# Altium PCB PCB1.PcbDoc
Units mm, origin at the board's own origin, x right, y up, seen from the top; angles counter-clockwise.
Board outline 50 x 50 mm, 2 copper layers (Top Layer, Bottom Layer), stack 1.57 mm thick; 8 components, 5 nets, 25 pads, 0 vias.
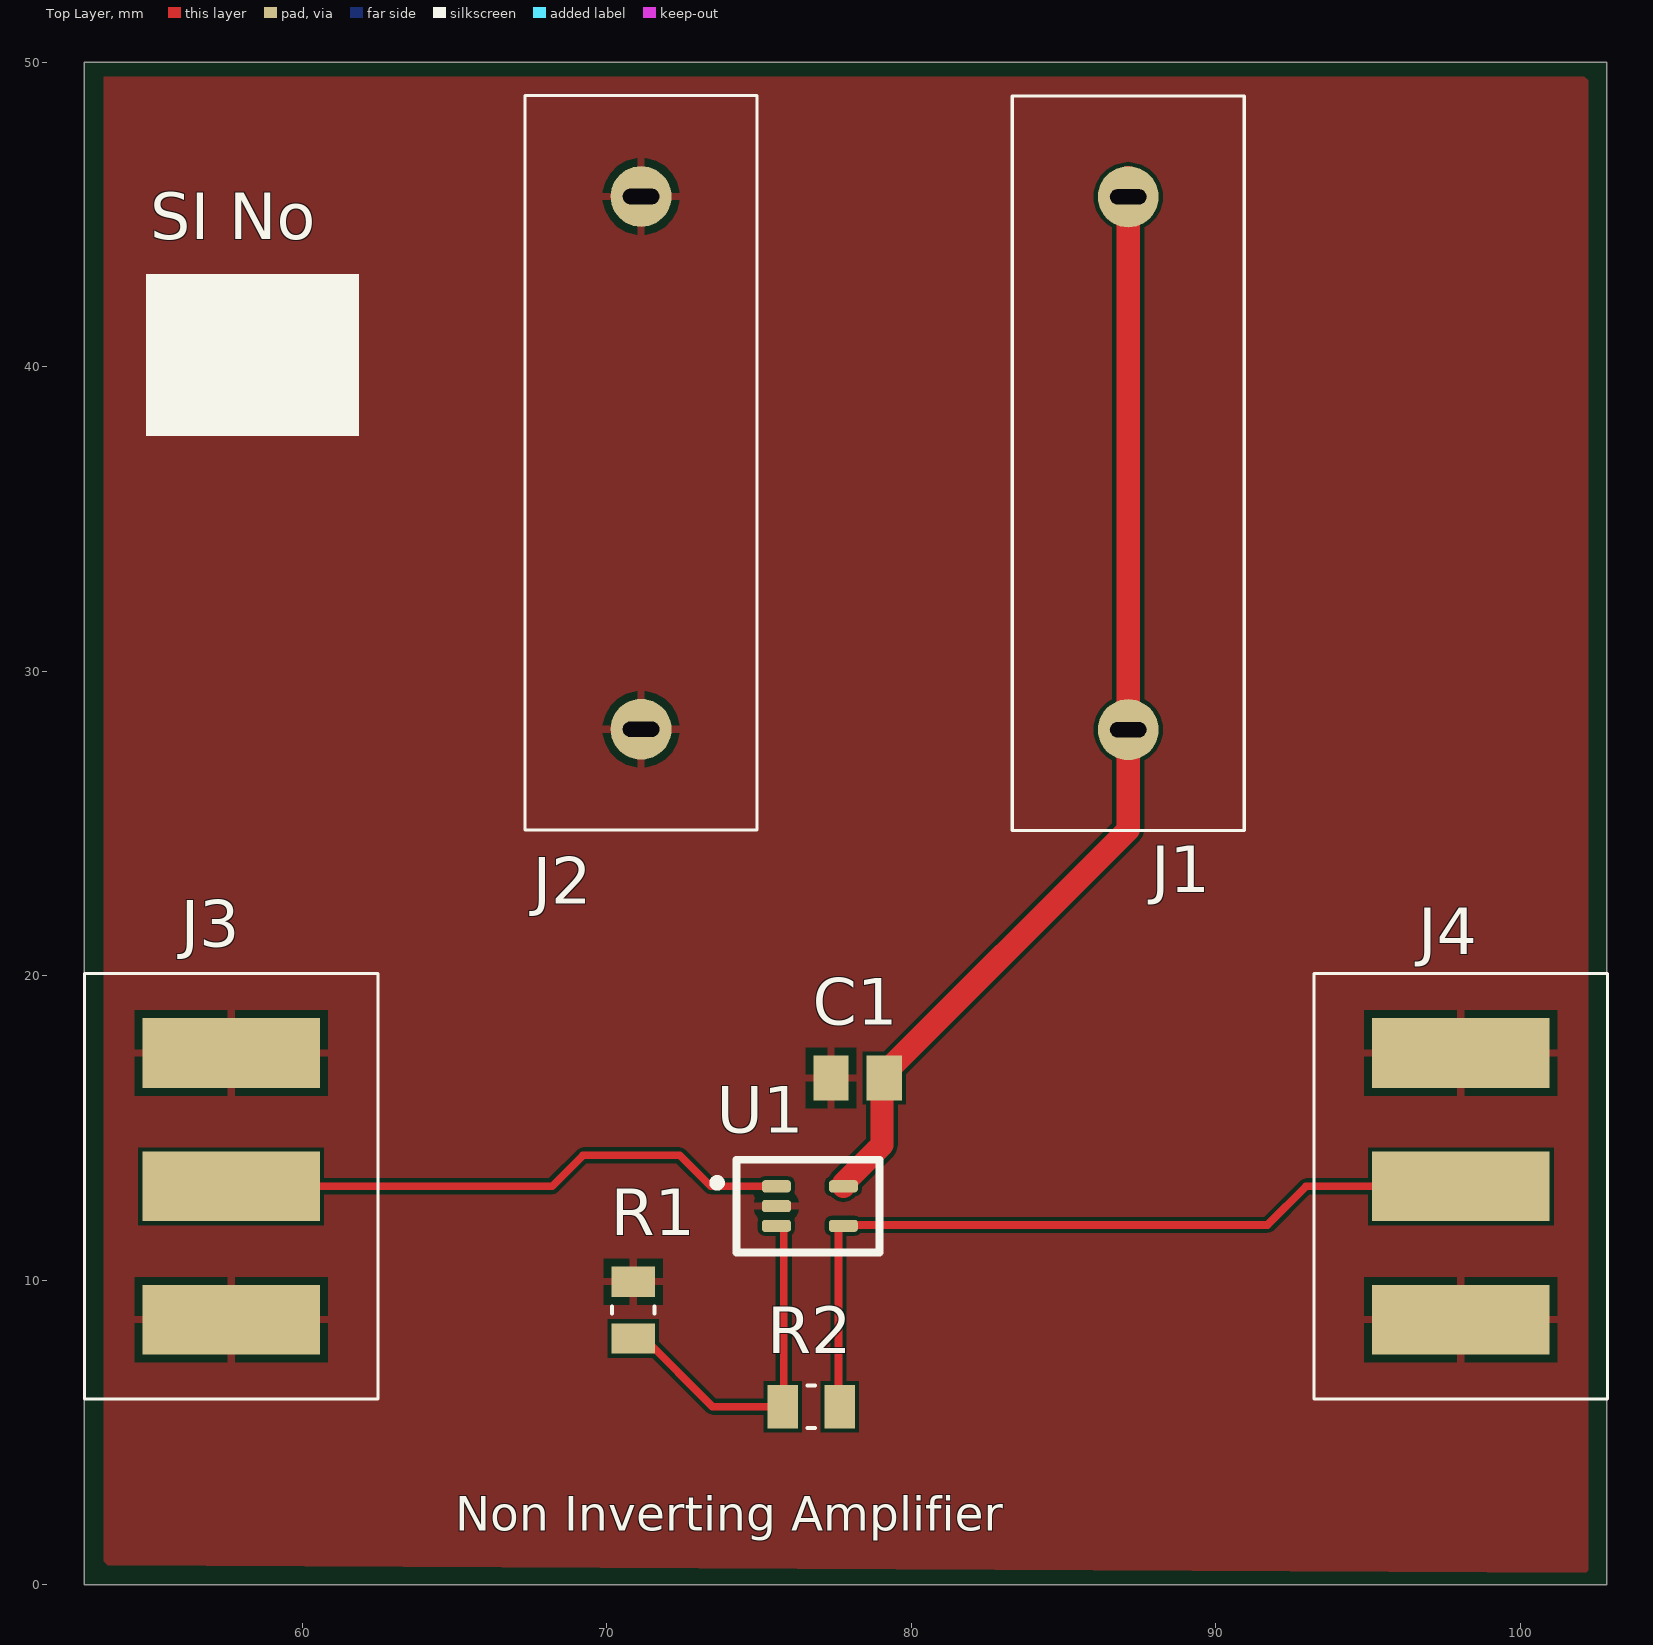
[diagram p0: Top Layer view]
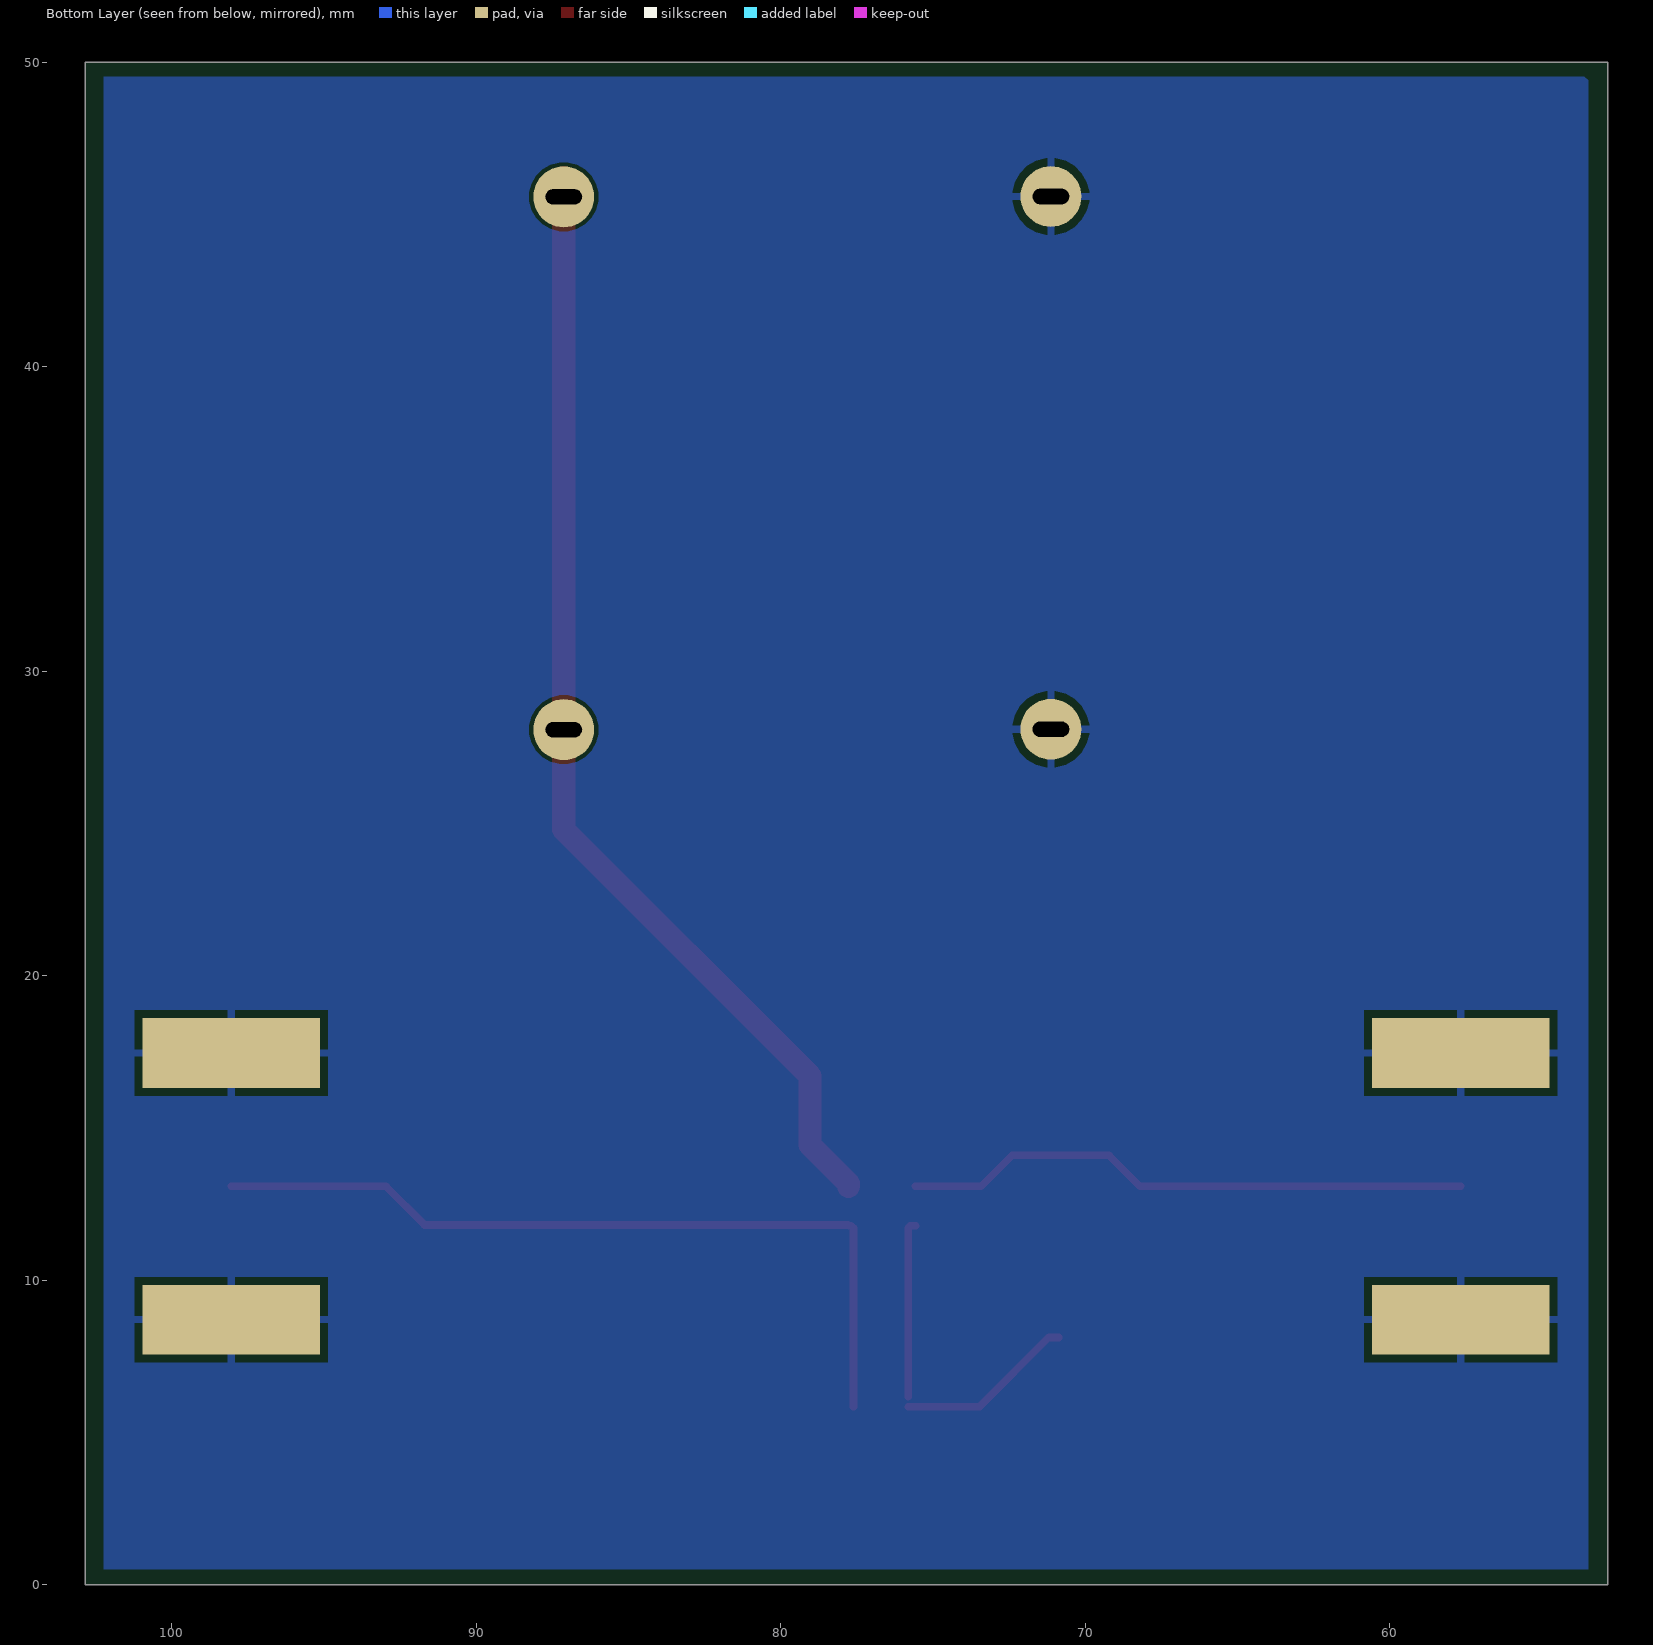
[diagram p1: Bottom Layer view, seen from below]
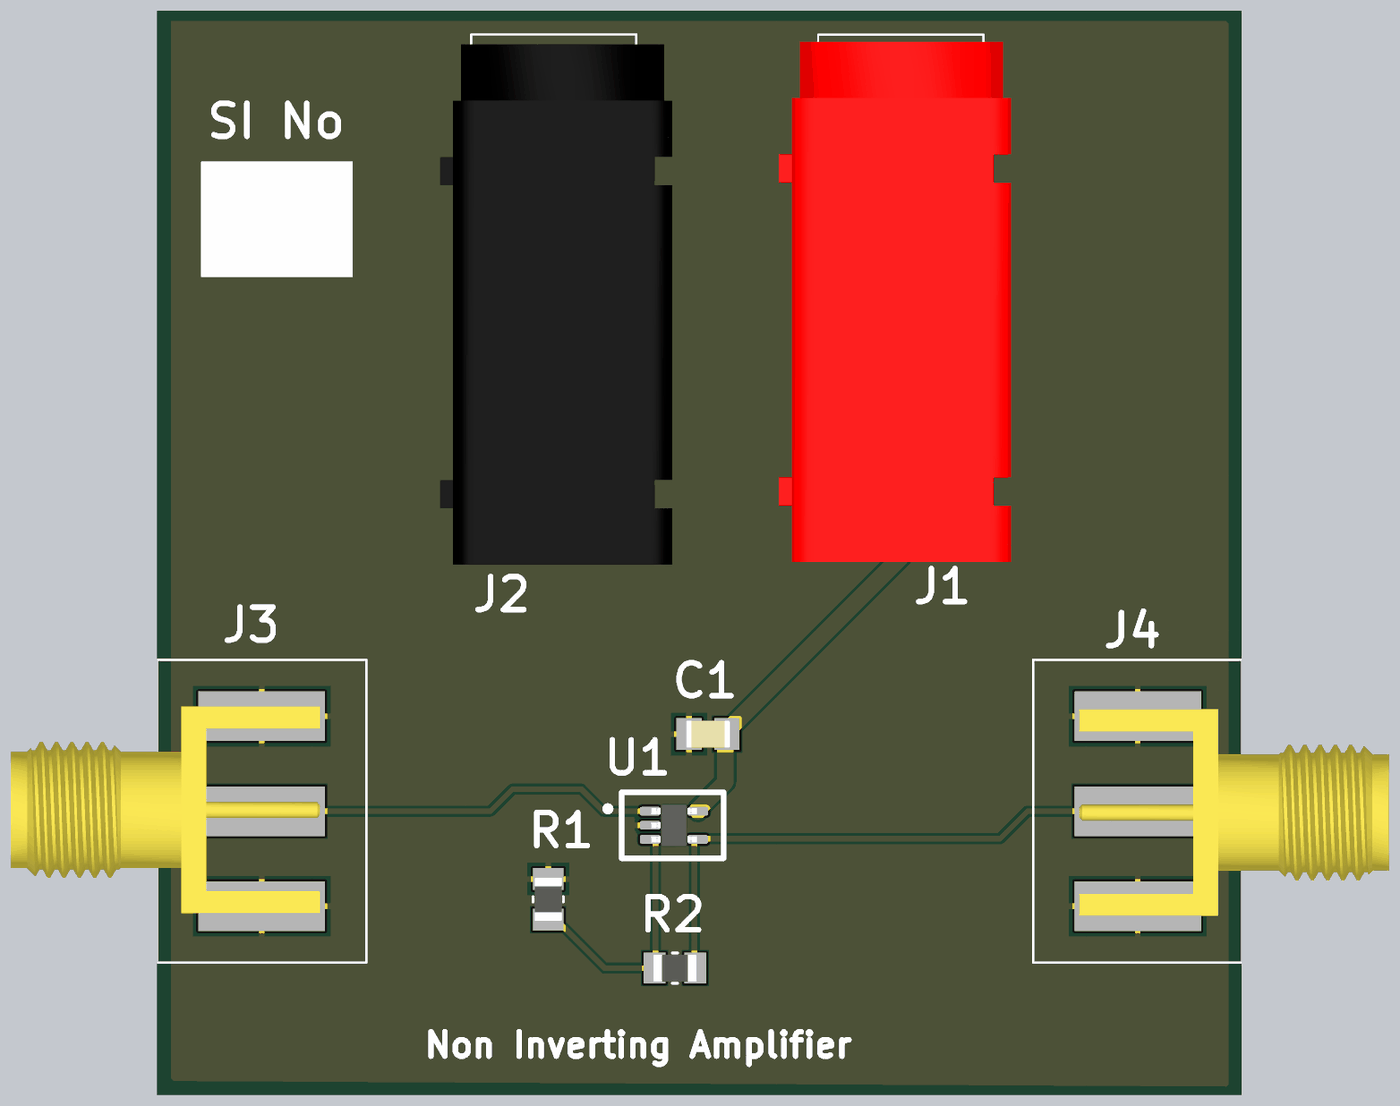
[diagram p2: 3D render of the assembled board from above, using the file's embedded part models]

## Layer stack, top to bottom
Top Solder: solder mask 0.02, Solder Resist, Dk 3.5
Top Layer: signal copper 0.035
Dielectric 1: dielectric 1.5, FR-4, Dk 4.8
Bottom Layer: signal copper 0.035
Bottom Solder: solder mask 0.02, Solder Resist, Dk 3.5

## Board outline
52.832,0 52.832,50 102.832,50 102.832,0

## Design rules (kind name [scope] priority, off if disabled: settings)
Clearance [All] p1: gap=0.127 ignorepadtopadclearanceinfootprint=TRUE
MinimumSolderMaskSliver [All] p1: minsoldermaskwidth=0.04
PolygonConnect [All] p1: connectstyle=Relief reliefconductorwidth=0.254 reliefentries=4 polygonreliefangle="90 Angle" airgapwidth=0.254
RoutingVias [All] p1: holewidth=0.254 width=0.508 viastyle="Through Hole" minholewidth=0.203 minwidth=0.457 maxholewidth=0.381 maxwidth=0.762
SilkToSolderMaskClearance [IsPad] p1: minsilkscreentomaskgap=0 clearancetoexposedcopper=TRUE
SolderMaskExpansion [All] p1: expansion=0.102 istentingtop=FALSE
SupplyNets "Schematic Supply Nets_1" [InNet('VCC')] p1: voltage=0.000
SupplyNets "Schematic Supply Nets" [InNet('GND')] p2: voltage=0.000
Width [All] p1: maxlimit=0.762 minlimit=0.127 preferedwidth=0.254
28 further rules are at their usual default settings.

## Components (designator, comment, footprint, x,y, rotation, side; value= is the part's Value field where it differs from the comment)
C1 "KGM21NR71H104KT" CAPC2012X88N 78.232,16.637 r180 top value=100nF
J1 "973582101" CON_973582101_Red 87.122,36.83 r90 top
J2 "973582100" CON_973582100_Black 71.12,36.843 r90 top
J3 "73251-1153" 73251-1153 54.737,13.081 r0 top
J4 "73251-1153" 73251-1153 100.965,13.081 r180 top
R1 "RG2012L-103-L-T05" RESC2012X65N 70.866,9.017 r270 top
R2 "RG2012L-103-L-T05" RESC2012X65N 76.708,5.842 r0 top
U1 "OPA333AIDCKR" SC70+5_0.95X0.4_0.65_SMD 76.665,12.431 r0 top

## Footprints (in the part's own frame and the unit in brackets; to place one, negate y for a bottom-side part, rotate by r counter-clockwise, add the part's x,y. Pads: shape width x height; smd on the part's side, far side on the other; paste and mask are expansions set on the pad)
73251-1153 [mm]
  rect 5.84x2.29 smd: 1(2.92,0) 2(2.92,-4.38) 2(2.92,4.38)
  rect 5.84x2.29 smd far side: 2(2.92,-4.38) 2(2.92,4.38)
  silkscreen extent -1.91,-6.98 7.75,6.98, body extent -8.66,-4.7 5.61,4.83, height 3.96
CAPC2012X88N [mm]
  rect 1.16x1.47 smd: 1(-0.875,0) 2(0.875,0)
  body extent -1.02,-0.64 1.02,0.64, height 1.4
CON_973582100_Black [mm]
  round 2 hole 0.5 slot 1.2 at 90 deg: 1(-8.75,0) 2(8.75,0)
  silkscreen extent -12.06,-3.81 12.06,3.81, body extent -12.38,-5.46 11.62,5.24, height 16
CON_973582101_Red [mm]
  round 2 hole 0.5 slot 1.2 at 90 deg: 1(-8.75,0) 2(8.75,0)
  silkscreen extent -12.06,-3.81 12.06,3.81, body extent -12.25,-5.08 11.75,5.62, height 16
RESC2012X65N [mm]
  rect 1x1.42 smd: 1(-0.935,0) 2(0.935,0)
  silkscreen extent -0.12,-0.7 0.12,0.7, body extent -1,-0.63 1,0.63, height 0.65
SC70+5_0.95X0.4_0.65_SMD [mm]
  rrect50% 0.95x0.4 smd: 1(-1.1,0.65) 2(-1.1,0) 3(-1.1,-0.65) 4(1.1,-0.65) 5(1.1,0.65)
  silkscreen extent -3.17,-1.52 2.29,1.52, body extent -1.05,-1 1.05,1, height 1

## Part data
C1: library part CAP_100nF_0805_SMD, "CAP CER 100nF"
J1: library part CON_973582101_Red, "Red Banana Connector", Manufacturer="Altech Corp", Manufacturer Number=973582101
J2: library part CON_973582100, "Black Banana Connector", Manufacturer="Altech Corp", Manufacturer Number=973582100
J3 J4: "SMA Connector", Manufacturer=Molex, Manufacturer Part Number=73251-1153
R1 R2: library part RES_10k_0805_SMD, "Resistor 10k Ohm 0805 SMD"
U1: library part IC_OPA333AIDCKR, "OP Amp", Manufacturer=TI, Manufactucture Numer=OPA333AIDCKR

## Nets (pads, with @x,y where several pads share a name; then routed paths per layer and width w, separated by ;. In a path a pad name is that pad's centre, name@x,y a point inside that pad or via, vN(x,y) a via of type N, cw(c..) or ccw(c..) an arc to the next point about the centre after c; other vN are vias at no path point)
GND: C1.2 J2.1 J2.2 J3.2 J4.2 R1.1 U1.2
In: J3.1 U1.1 | length 18.7
  Top Layer w0.254: J3.1 68.199,13.081 69.215,14.097 72.39,14.097 73.406,13.081 U1.1
NetR1_2: R1.2 R2.1 U1.3 | length 11.7
  Top Layer w0.254: R1.2@70.866,8.117 71.191,8.117 73.466,5.842 R2.1@75.808,5.842 ; U1.3 75.735,11.781 75.808,11.708 R2.1@75.808,6.167
Out: J4.1 R2.2 U1.4 | length 26.9
  Top Layer w0.254: R2.2@77.608,5.842 77.608,11.708 77.681,11.781 U1.4 77.795,11.811 91.694,11.811 92.964,13.081 J4.1
VCC: C1.1 J1.1 J1.2 U1.5 | length 37
  Top Layer w0.762: U1.5 77.765,13.168 79.029,14.432 79.029,16.637 79.029,16.703 87.122,24.796 87.122,28.715 J1.2@87.122,46.215

## Polygon pours and split planes (outlines as drawn)
GND on Bottom Layer "GND_L02_P002" (solid, pour order 2): 53.467,0.508 53.467,49.403 53.594,49.53 102.235,49.53 102.235,0.508
GND on Top Layer "GND_L01_P001" (solid, pour order 1): 53.594,0.635 53.467,0.762 53.467,49.53 102.108,49.53 102.235,49.403 102.235,0.381

## Silkscreen, mask and mechanical layers (free items; w line width, h text height)
Top Overlay:
  rectangle: 54.864,37.719 61.849,43.053
  text "SI No" at 54.991,44.196 h1.52
  text "Non Inverting Amplifier" at 65.024,1.772 h1.12
Mechanical 15:
  the board outline again, w0.1